# Altium PCB motordriver-v5.0.PcbDoc (part 2 of 2)
Units mil, origin at the board's own origin, x right, y up, seen from the top; angles counter-clockwise.
Board outline 6000 x 4000 mil, 4 copper layers (Top Copper, Signal Layer 1, Signal Layer 2, Bottom Copper), stack 46.063 mil thick; 260 components, 214 nets, 1002 pads, 160 vias.
Unrouted connection lines stored in the file: 596.
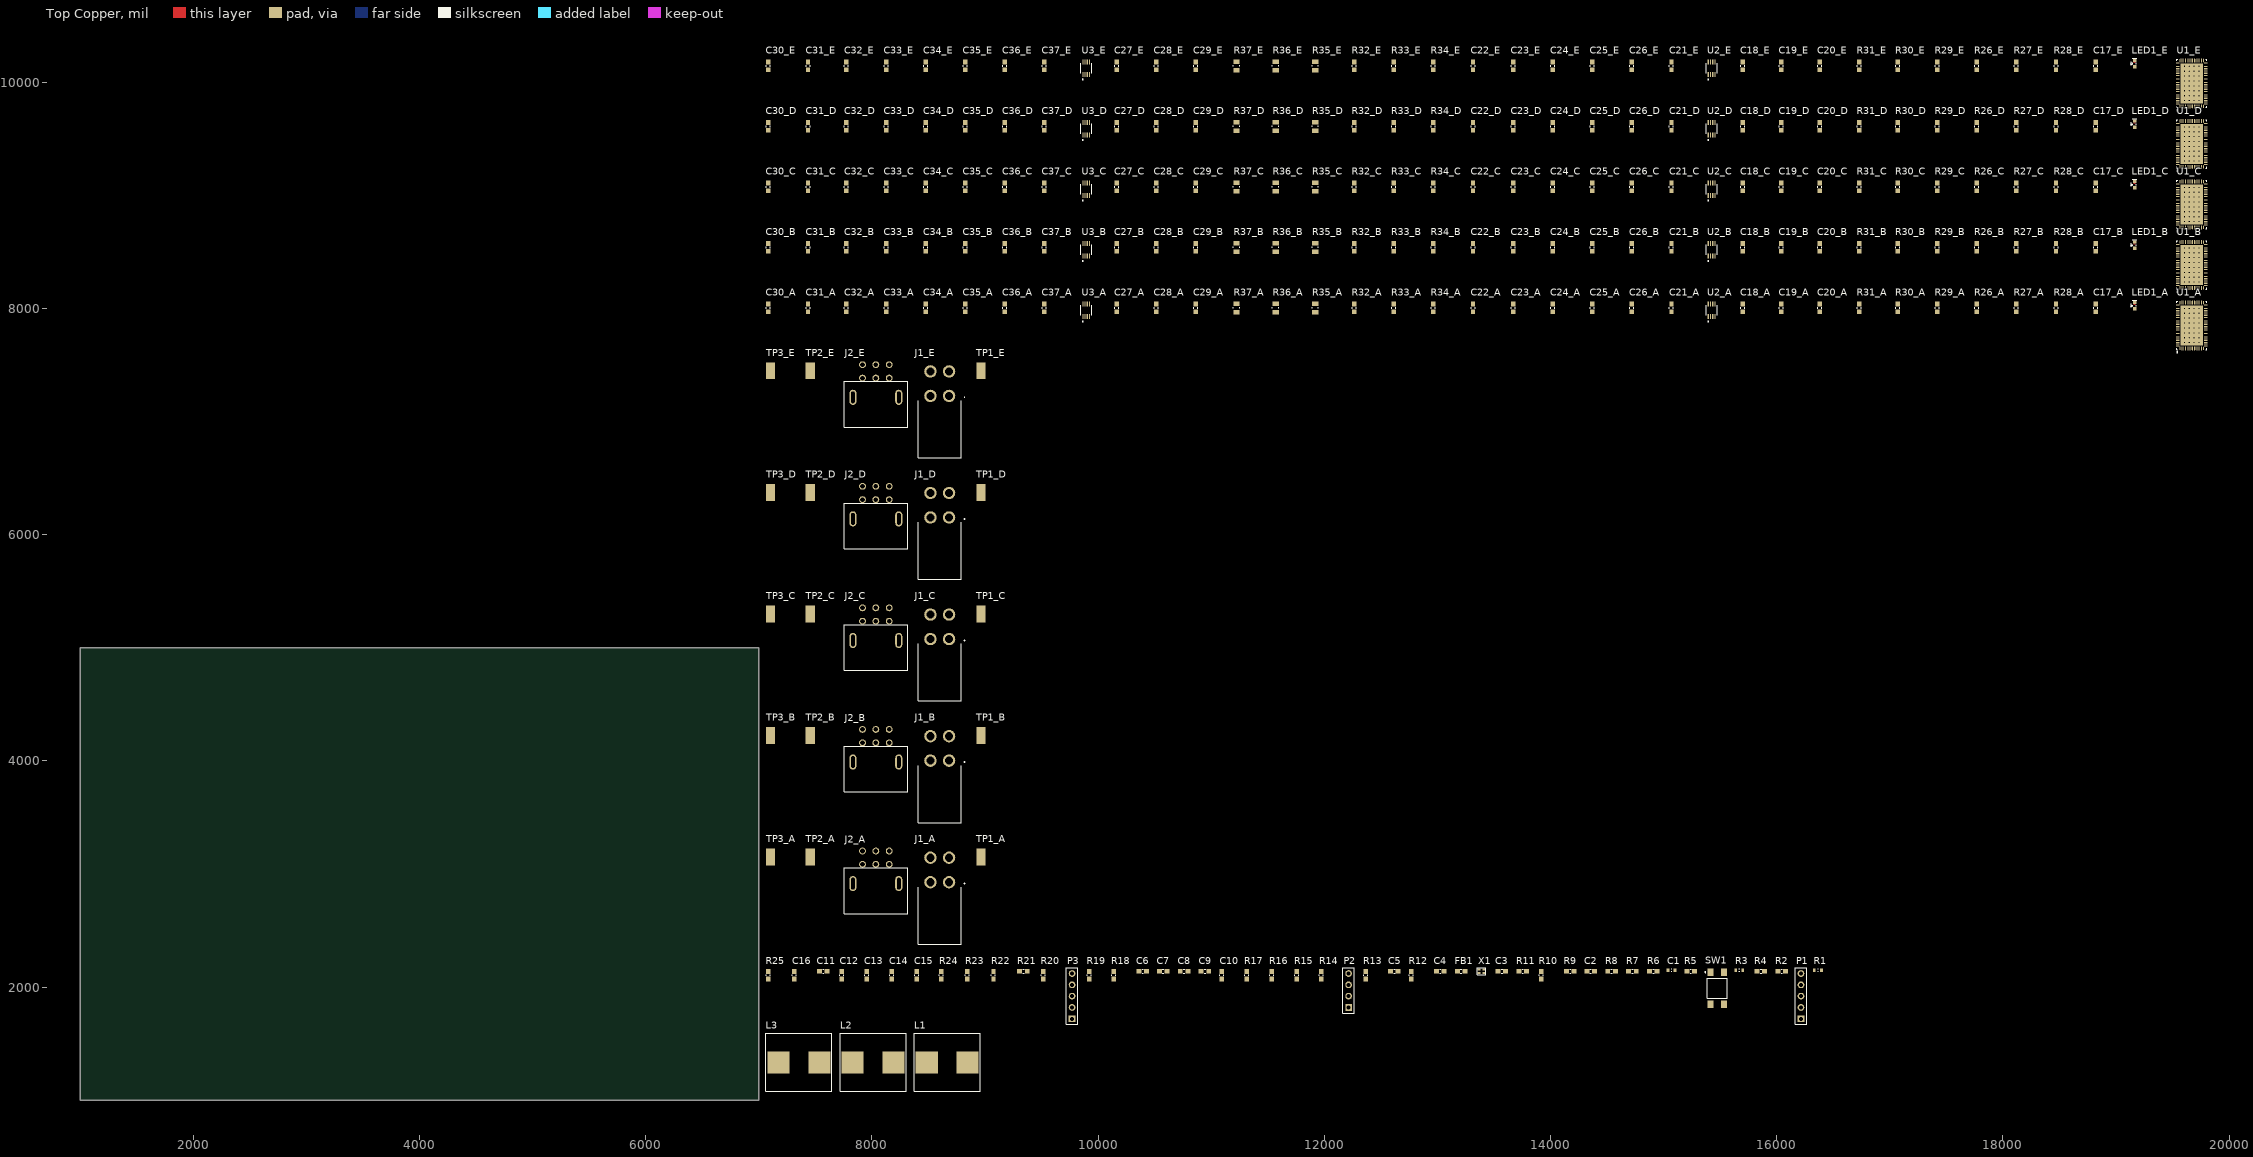
[diagram p0: Top Copper view]

## Via types
v1: diameter 24, hole 10, Top Copper to Bottom Copper, 160 vias

## Nets (pads, with @x,y where several pads share a name; then routed paths per layer and width w, separated by ;. In a path a pad name is that pad's centre, name@x,y a point inside that pad or via, vN(x,y) a via of type N, cw(c..) or ccw(c..) an arc to the next point about the centre after c; other vN are vias at no path point) (continued)
NetC24_C_2: C24_C.2 U1_C.15
NetC24_D_2: C24_D.2 U1_D.15
NetC24_E_2: C24_E.2 U1_E.15
NetC25_A_2: C25_A.2 U1_A.45
NetC25_B_2: C25_B.2 U1_B.45
NetC25_C_2: C25_C.2 U1_C.45
NetC25_D_2: C25_D.2 U1_D.45
NetC25_E_2: C25_E.2 U1_E.45
NetC26_A_2: C26_A.2 U1_A.63
NetC26_B_2: C26_B.2 U1_B.63
NetC26_C_2: C26_C.2 U1_C.63
NetC26_D_2: C26_D.2 U1_D.63
NetC26_E_2: C26_E.2 U1_E.63
NetC27_A_2: C27_A.2 R35_A.2 U3_A.1
NetC27_B_2: C27_B.2 R35_B.2 U3_B.1
NetC27_C_2: C27_C.2 R35_C.2 U3_C.1
NetC27_D_2: C27_D.2 R35_D.2 U3_D.1
NetC27_E_2: C27_E.2 R35_E.2 U3_E.1
NetC28_A_2: C28_A.2 R36_A.2 U3_A.3
NetC28_B_2: C28_B.2 R36_B.2 U3_B.3
NetC28_C_2: C28_C.2 R36_C.2 U3_C.3
NetC28_D_2: C28_D.2 R36_D.2 U3_D.3
NetC28_E_2: C28_E.2 R36_E.2 U3_E.3
NetC29_A_2: C29_A.2 R37_A.2 U3_A.6
NetC29_B_2: C29_B.2 R37_B.2 U3_B.6
NetC29_C_2: C29_C.2 R37_C.2 U3_C.6
NetC29_D_2: C29_D.2 R37_D.2 U3_D.6
NetC29_E_2: C29_E.2 R37_E.2 U3_E.6
NetP1_1: P1.1 R2.2
NetP1_2: P1.2 R4.2
NetP1_3: P1.3 R6.2
NetP1_4: P1.4 R7.2
NetP1_5: P1.5 R8.2
NetP2_1: P2.1 R13.2
NetP2_2: P2.2 R14.2
NetP2_3: P2.3 R15.2
NetP2_4: P2.4 R17.2
NetP3_1: P3.1 R19.2
NetP3_2: P3.2 R20.2
NetP3_3: P3.3 R21.2
NetP3_4: P3.4 R22.2
NetP3_5: P3.5 R23.2
NetR3_2: R3.2 SW1.3 SW1.4
NetU1_A_33: U1_A.33 U3_A.2
NetU1_A_34: U1_A.34 U3_A.5
NetU1_A_35: U1_A.35 U3_A.7
NetU1_A_36: U1_A.36 U2_A.2
NetU1_A_37: U1_A.37 U2_A.5
NetU1_A_38: U1_A.38 U2_A.7
NetU1_B_33: U1_B.33 U3_B.2
NetU1_B_34: U1_B.34 U3_B.5
NetU1_B_35: U1_B.35 U3_B.7
NetU1_B_36: U1_B.36 U2_B.2
NetU1_B_37: U1_B.37 U2_B.5
NetU1_B_38: U1_B.38 U2_B.7
NetU1_C_33: U1_C.33 U3_C.2
NetU1_C_34: U1_C.34 U3_C.5
NetU1_C_35: U1_C.35 U3_C.7
NetU1_C_36: U1_C.36 U2_C.2
NetU1_C_37: U1_C.37 U2_C.5
NetU1_C_38: U1_C.38 U2_C.7
NetU1_D_33: U1_D.33 U3_D.2
NetU1_D_34: U1_D.34 U3_D.5
NetU1_D_35: U1_D.35 U3_D.7
NetU1_D_36: U1_D.36 U2_D.2
NetU1_D_37: U1_D.37 U2_D.5
NetU1_D_38: U1_D.38 U2_D.7
NetU1_E_33: U1_E.33 U3_E.2
NetU1_E_34: U1_E.34 U3_E.5
NetU1_E_35: U1_E.35 U3_E.7
NetU1_E_36: U1_E.36 U2_E.2
NetU1_E_37: U1_E.37 U2_E.5
NetU1_E_38: U1_E.38 U2_E.7
PWM.UH_A: U1_A.39
PWM.UH_B: U1_B.39
PWM.UH_C: U1_C.39
PWM.UH_D: U1_D.39
PWM.UH_E: U1_E.39
PWM.UL_A: U1_A.40
PWM.UL_B: U1_B.40
PWM.UL_C: U1_C.40
PWM.UL_D: U1_D.40
PWM.UL_E: U1_E.40
PWM.VH_A: U1_A.41
PWM.VH_B: U1_B.41
PWM.VH_C: U1_C.41
PWM.VH_D: U1_D.41
PWM.VH_E: U1_E.41
PWM.VL_A: U1_A.42
PWM.VL_B: U1_B.42
PWM.VL_C: U1_C.42
PWM.VL_D: U1_D.42
PWM.VL_E: U1_E.42
PWM.WH_A: U1_A.46
PWM.WH_B: U1_B.46
PWM.WH_C: U1_C.46
PWM.WH_D: U1_D.46
PWM.WH_E: U1_E.46
PWM.WL_A: U1_A.47
PWM.WL_B: U1_B.47
PWM.WL_C: U1_C.47
PWM.WL_D: U1_D.47
PWM.WL_E: U1_E.47
R\S\T\: C1.2 R1.1 R3.1 U1_A.50 U1_B.50 U1_C.50 U1_D.50 U1_E.50
SPI_CTRL.C\S\_\C\T\R\L\: C7.2 R13.1 U1_A.6 U1_B.6 U1_C.6 U1_D.6 U1_E.6
SPI_CTRL.SPI_MISO: C10.2 R17.1 U1_A.9 U1_B.9 U1_C.9 U1_D.9 U1_E.9
SPI_CTRL.SPI_MOSI: C9.2 R15.1 U1_A.8 U1_B.8 U1_C.8 U1_D.8 U1_E.8
SPI_CTRL.SPI_SCK: C8.2 R14.1 U1_A.7 U1_B.7 U1_C.7 U1_D.7 U1_E.7
SPI_DBG.C\S\_\D\B\G\: C11.2 U1_A.75 U1_B.75 U1_C.75 U1_D.75 U1_E.75
SPI_DBG.DBG_SPI_MISO: C14.2 R22.1 U1_A.4 U1_B.4 U1_C.4 U1_D.4 U1_E.4
SPI_DBG.DBG_SPI_MOSI: C13.2 R21.1 U1_A.1 U1_B.1 U1_C.1 U1_D.1 U1_E.1
SPI_DBG.DBG_SPI_SCK: C12.2 R20.1 U1_A.76 U1_B.76 U1_C.76 U1_D.76 U1_E.76
SPI_DBG.DBG_SPI_TRG: C15.2 R23.1 U1_A.5 U1_B.5 U1_C.5 U1_D.5 U1_E.5
SPI_DRV.C\S\_\D\R\V\: C4.2 R11.1
STATUS_CTRL1: LED1_A.1 R2.1 U1_A.12
STATUS_CTRL2: LED1_B.1 R4.1 U1_B.12
STATUS_CTRL3: LED1_C.1 R6.1 U1_C.12
STATUS_CTRL4: LED1_D.1 R7.1 U1_D.12
STATUS_CTRL5: LED1_E.1 R8.1 U1_E.12
TEMP: C6.2 R16.2 R18.1 U1_A.21 U1_B.21 U1_C.21 U1_D.21 U1_E.21
VCC: R24.1
VDD: C17_A.2 C17_B.2 C17_C.2 C17_D.2 C17_E.2 C21_A.2 C21_B.2 C21_C.2 C21_D.2 C21_E.2 C30_A.2 C30_B.2 C30_C.2 C30_D.2 C30_E.2 C31_A.2 C31_B.2 C31_C.2 C31_D.2 C31_E.2 C32_A.2 C32_B.2 C32_C.2 C32_D.2 C32_E.2 C33_A.2 C33_B.2 C33_C.2 C33_D.2 C33_E.2 C34_A.2 C34_B.2 C34_C.2 C34_D.2 C34_E.2 C35_A.2 C35_B.2 C35_C.2 C35_D.2 C35_E.2 C36_A.2 C36_B.2 C36_C.2 C36_D.2 C36_E.2 C37_A.2 C37_B.2 C37_C.2 C37_D.2 C37_E.2 FB1.1 J2_A.5 J2_B.5 J2_C.5 J2_D.5 J2_E.5 R1.2 R12.1 U1_A.2 U1_A.13 U1_A.43 U1_A.52 U1_A.61 U1_A.72 U1_B.2 U1_B.13 U1_B.43 U1_B.52 U1_B.61 U1_B.72 U1_C.2 U1_C.13 U1_C.43 U1_C.52 U1_C.61 U1_C.72 U1_D.2 U1_D.13 U1_D.43 U1_D.52 U1_D.61 U1_D.72 U1_E.2 U1_E.13 U1_E.43 U1_E.52 U1_E.61 U1_E.72 U2_A.8 U2_B.8 U2_C.8 U2_D.8 U2_E.8 U3_A.8 U3_B.8 U3_C.8 U3_D.8 U3_E.8
pads on no net: C2.1 C16.1 C17_A.1 C17_B.1 C17_C.1 C17_D.1 C17_E.1 C21_A.1 C21_B.1 C21_C.1 C21_D.1 C21_E.1 C30_A.1 C30_B.1 C30_C.1 C30_D.1 C30_E.1 C35_A.1 C35_B.1 C35_C.1 C35_D.1 C35_E.1 J1_A.4 J1_A.MH1 J1_B.4 J1_B.MH1 J1_C.4 J1_C.MH1 J1_D.4 J1_D.MH1 J1_E.4 J1_E.MH1 J2_A.2 J2_A.3 J2_A.6 J2_A.MH J2_A.MH1 J2_A.MH2 J2_B.3 J2_B.6 J2_B.MH J2_B.MH1 J2_B.MH2 J2_C.1 J2_C.6 J2_C.MH J2_C.MH1 J2_C.MH2 J2_D.1 J2_D.6 J2_D.MH J2_D.MH1 J2_D.MH2 J2_E.6 J2_E.MH J2_E.MH1 J2_E.MH2 R9.1 R9.2 R11.2 R12.2 R16.1 R19.1 R26_A.2 R26_B.2 R27_B.2 R27_C.2 R27_D.2 R28_C.2 R28_D.2 R29_A.1 R29_B.1 R30_B.1 R30_C.1 R30_D.1 R31_C.1 R31_D.1 U1_A.10 U1_A.11 U1_A.22 U1_A.25 U1_A.26 U1_A.27 U1_A.28 U1_A.29 U1_A.30 U1_A.48 U1_A.49 U1_A.56 U1_A.57 U1_A.58 U1_A.64 U1_A.65 U1_A.66 U1_A.67 U1_A.68 U1_A.69 U1_A.70 U1_A.71 U1_A.74 U1_B.10 U1_B.11 U1_B.22 U1_B.25 U1_B.26 U1_B.27 U1_B.28 U1_B.29 U1_B.30 U1_B.48 U1_B.49 U1_B.56 U1_B.57 U1_B.58 U1_B.64 U1_B.65 U1_B.66 U1_B.67 U1_B.68 U1_B.69 U1_B.70 U1_B.71 U1_B.74 U1_C.10 U1_C.11 U1_C.22 U1_C.25 U1_C.26 U1_C.27 U1_C.28 U1_C.29 U1_C.30 U1_C.48 U1_C.49 U1_C.56 U1_C.57 U1_C.58 U1_C.64 U1_C.65 U1_C.66 U1_C.67 U1_C.68 U1_C.69 U1_C.70 U1_C.71 U1_C.74 U1_D.10 U1_D.11 U1_D.22 U1_D.25 U1_D.26 U1_D.27 U1_D.28 U1_D.29 U1_D.30 U1_D.48 U1_D.49 U1_D.56 U1_D.57 U1_D.58 U1_D.64 U1_D.65 U1_D.66 U1_D.67 U1_D.68 U1_D.69 U1_D.70 U1_D.71 U1_D.74 U1_E.10 U1_E.11 U1_E.22 U1_E.25 U1_E.26 U1_E.27 U1_E.28 U1_E.29 U1_E.30 U1_E.48 U1_E.49 U1_E.56 U1_E.57 U1_E.58 U1_E.64 U1_E.65 U1_E.66 U1_E.67 U1_E.68 U1_E.69 U1_E.70 U1_E.71 U1_E.74